# Altium PCB Visualizacion_PCB.PcbDoc
Units mm, origin at the board's own origin, x right, y up, seen from the top; angles counter-clockwise.
Board outline 38.02 x 30.53 mm, 2 copper layers (Top Layer, Bottom Layer); 14 components, 21 nets, 54 pads, 0 vias.
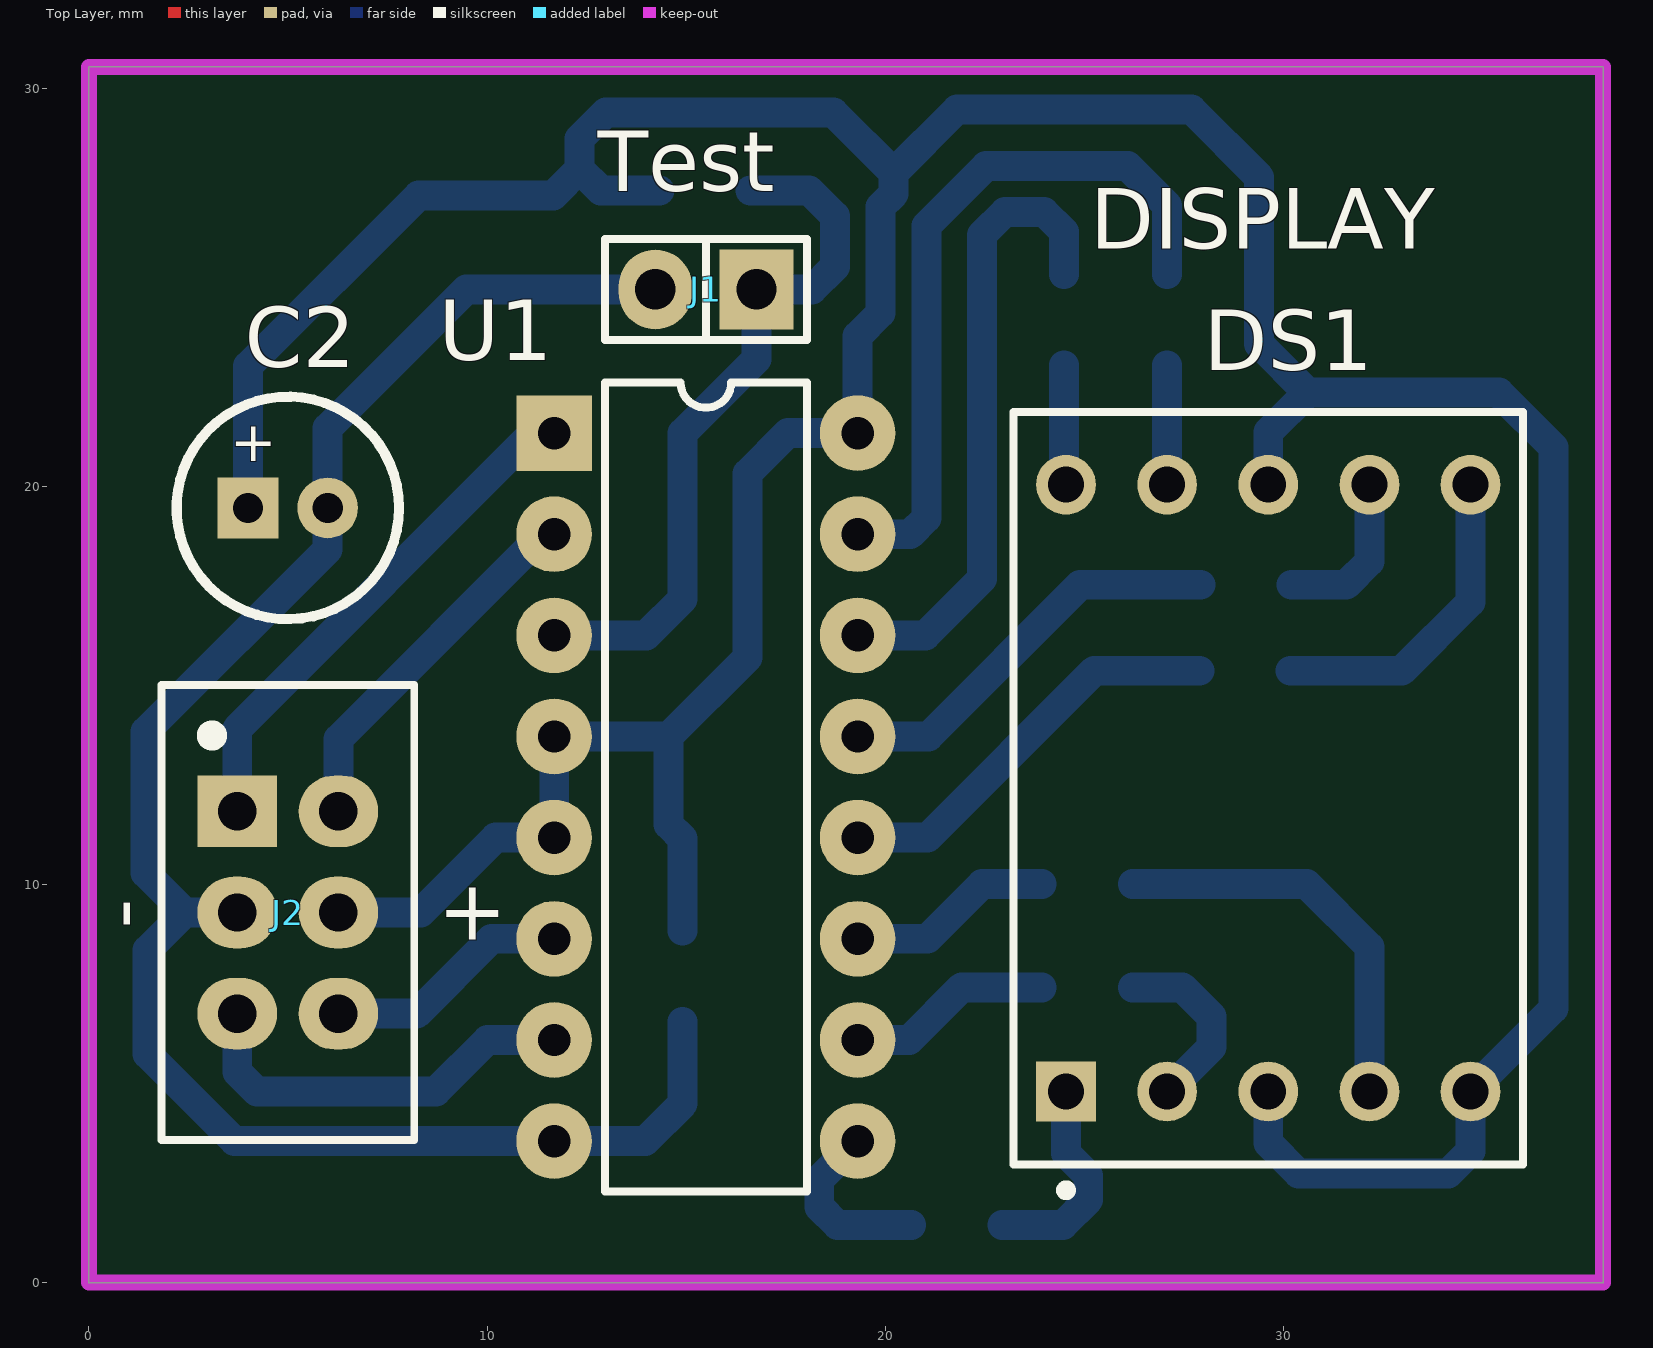
[diagram p0: Top Layer view]
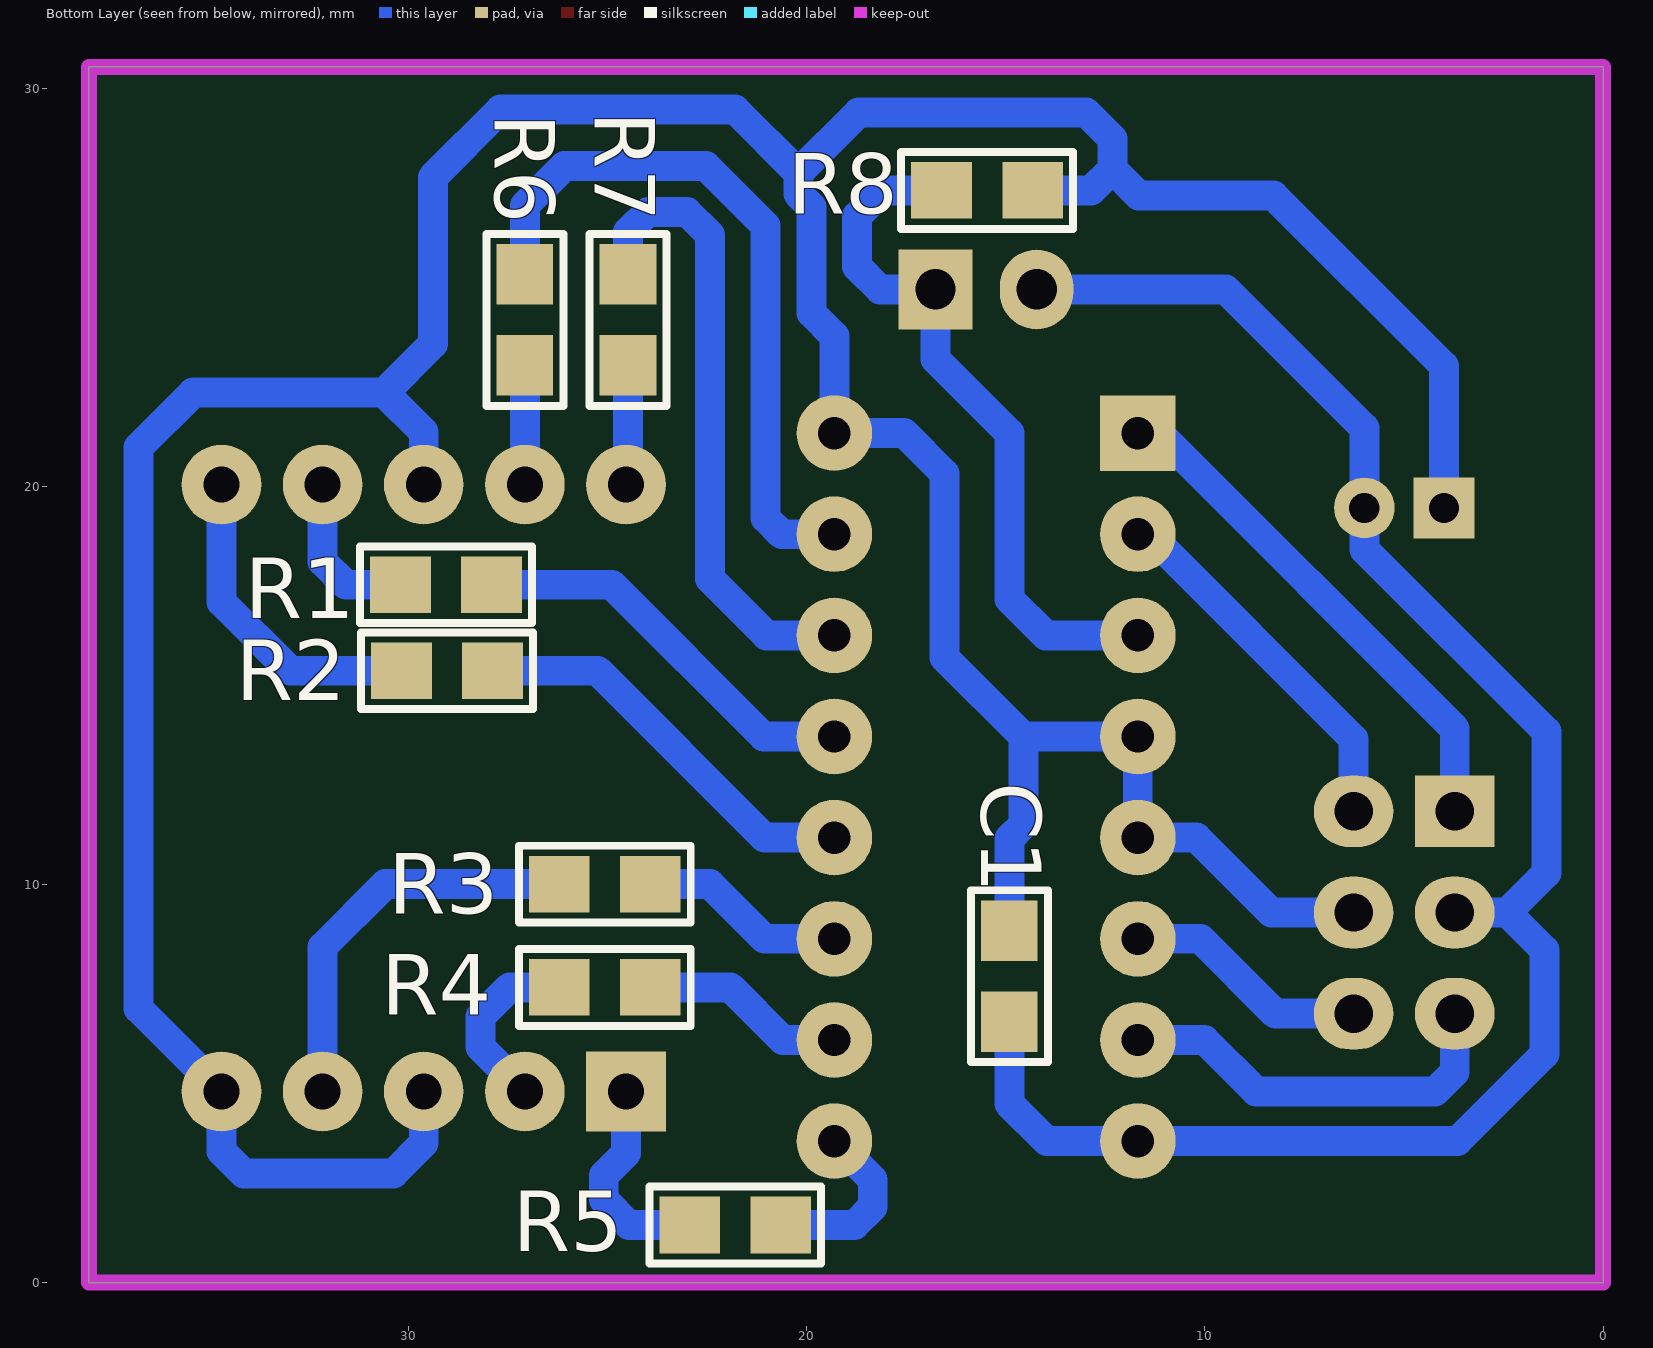
[diagram p1: Bottom Layer view, seen from below]
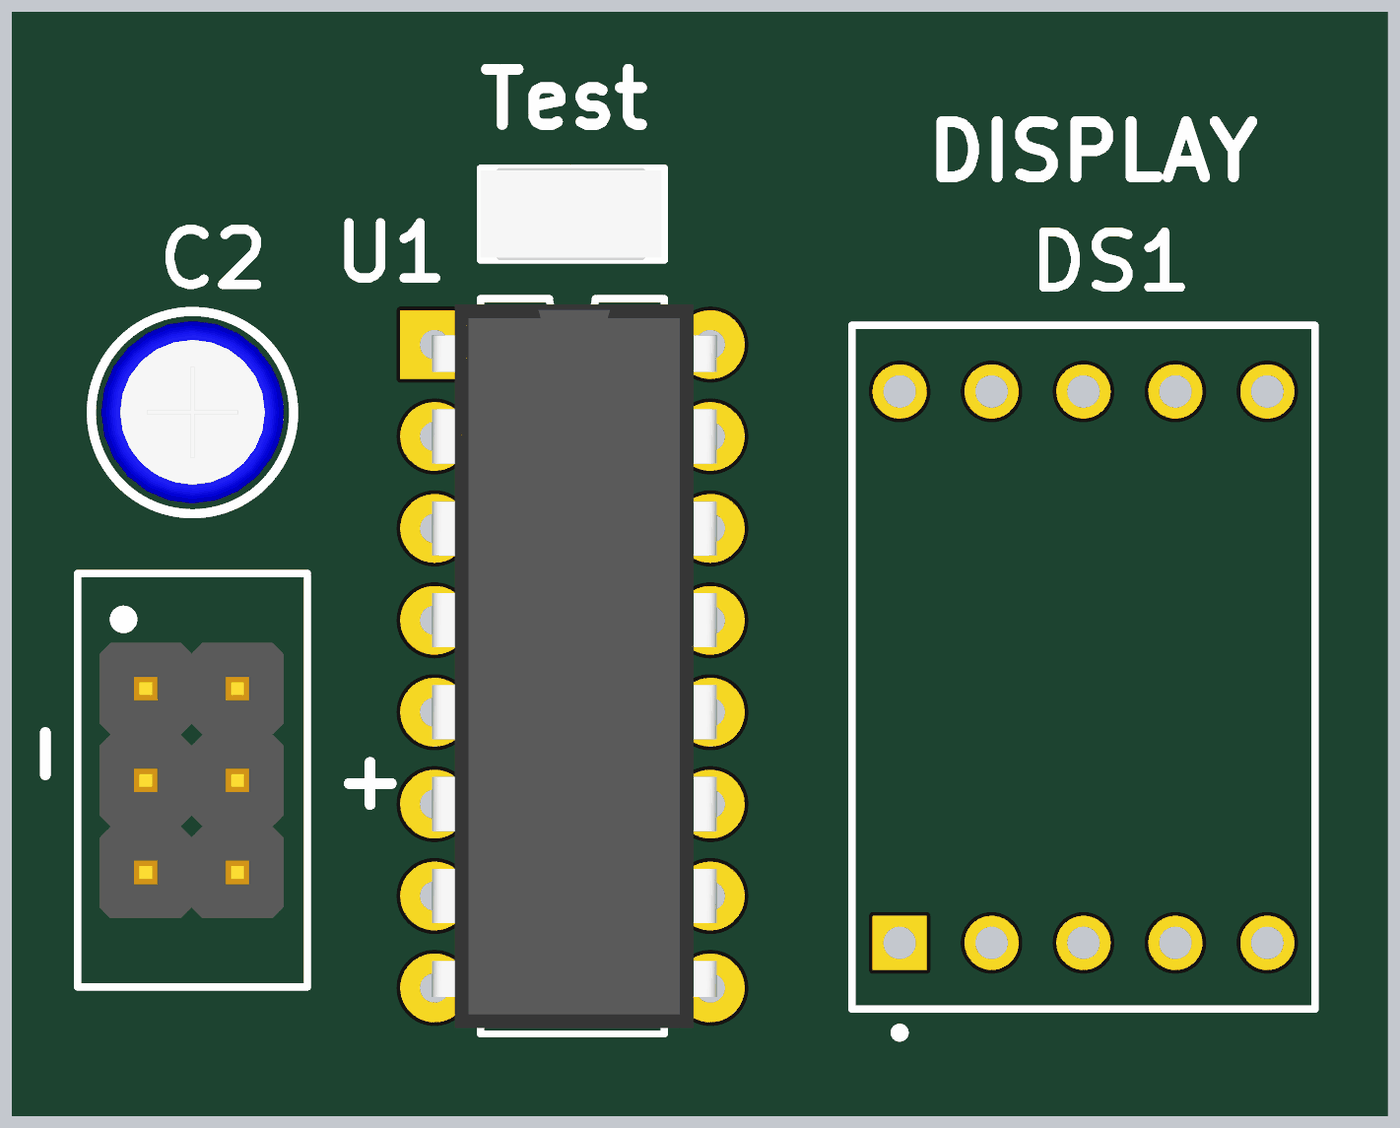
[diagram p2: 3D render of the assembled board from above, using the file's embedded part models]
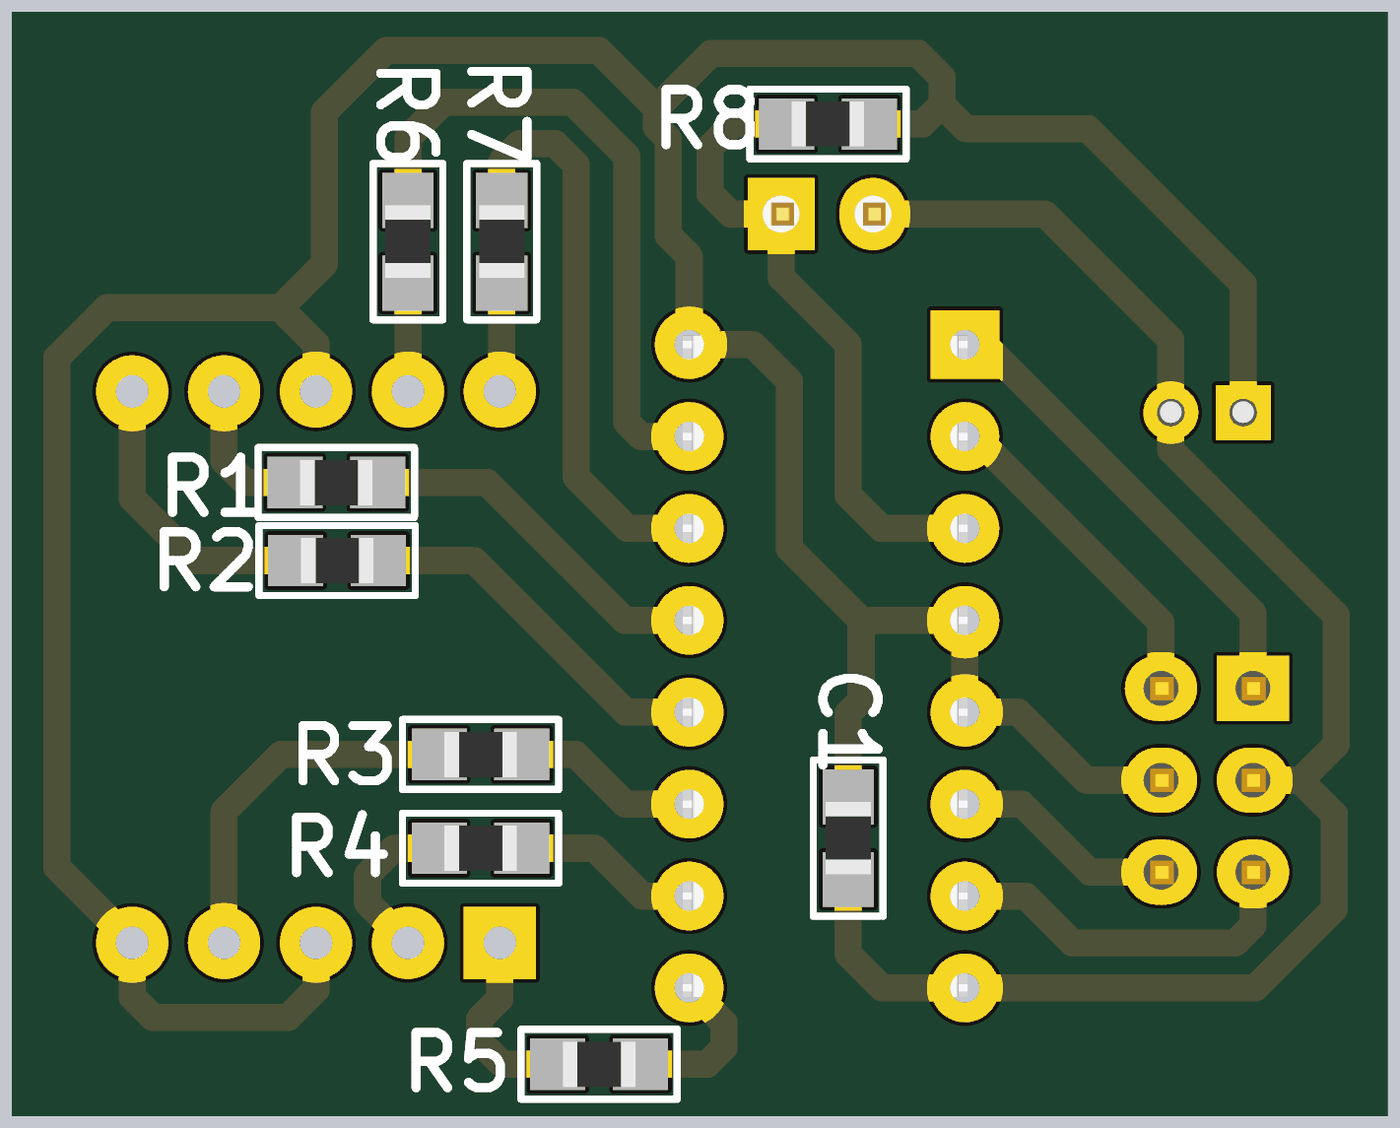
[diagram p3: 3D render of the assembled board from below, using the file's embedded part models]

## Layer stack, top to bottom
Top Solder: solder mask 0.0102, Solder Resist, Dk 3.5
Top Layer: signal copper 0.0356
Dielectric 1: dielectric 0.32, FR-4, Dk 4.8
Bottom Layer: signal copper 0.0356
Bottom Solder: solder mask 0.0102, Solder Resist, Dk 3.5

## Board outline
0,0 38.024,0 38.024,30.531 0,30.531

## Design rules (kind name [scope] priority, off if disabled: settings)
Clearance [All] p1: gap=0.4
PolygonConnect [All] p1: connectstyle=Relief reliefconductorwidth=0.254 reliefentries=4 polygonreliefangle="90 Angle" airgapwidth=0.254
RoutingVias [All] p1: holewidth=0.711 width=1.27 viastyle="Through Hole" minholewidth=0.711 minwidth=1.27 maxholewidth=0.711 maxwidth=1.27
SolderMaskExpansion [All] p1: expansion=0.102
Width [All] p1: maxlimit=0.75 minlimit=0.5 preferedwidth=0.6
Width PowerWidth [InNetClass('Power')] p2: maxlimit=2 minlimit=0.8 preferedwidth=1
30 further rules are at their usual default settings.

## Classes and differential pairs
net class Power: GND VCC

## Components (designator, comment, footprint, x,y, rotation, side; value= is the part's Value field where it differs from the comment)
C1 "100nF" 0805 14.91,7.696 r270 bottom
C2 "10uF" CAP100RP 4.994,19.456 r0 top
DS1 "Dpy Blue-CA" H 29.616,12.421 r0 top
J1 "JUMPER" JUMPER2 15.494,24.943 r180 top
J2 "INPUT" SIP3*2 3.724,11.836 r270 top
R1 "680" 0805 29.058,17.526 r0 bottom
R2 "680" 0805 29.032,15.367 r0 bottom
R3 "680" 0805 25.07,10.008 r0 bottom
R4 "680" 0805 25.07,7.417 r0 bottom
R5 "680" 0805 21.793,1.448 r0 bottom
R6 "680" 0805 27.076,24.181 r270 bottom
R7 "680" 0805 24.486,24.181 r270 bottom
R8 "100k" 0805 15.469,27.432 r180 bottom
U1 "SN74LS47N" DIP16 11.684,21.336 r0 top

## Footprints (in the part's own frame and the unit in brackets; to place one, negate y for a bottom-side part, rotate by r counter-clockwise, add the part's x,y. Pads: shape width x height; smd on the part's side, far side on the other; paste and mask are expansions set on the pad)
0805 [mil] "Pasivo 0805"
  rect 60x56 smd: 1(-45,0) 2(45,0)
  silkscreen extent -85,-38 85,38, body extent -39,-25 39,25, height 15
CAP100RP [mil] "Body diameter 5mm"
  rect 60x60 hole 30: 1(-39.37,0)
  round 60 hole 30: 2(39.37,0)
  silkscreen extent -110,-110 110,110, body extent -99,-99 99,100, height 454
DIP16 [mm]
  rect 1.9x1.9 hole 0.813: 1(0,0)
  round 1.9 hole 0.813: 2(0,-2.54) 3(0,-5.08) 4(0,-7.62) 5(0,-10.16) 6(0,-12.7) 7(0,-15.24) 8(0,-17.78) 9(7.62,-17.78) 10(7.62,-15.24) 11(7.62,-12.7) 12(7.62,-10.16) 13(7.62,-7.62) 14(7.62,-5.08) 15(7.62,-2.54) 16(7.62,0)
  silkscreen extent 1.27,-19.05 6.35,1.27, body extent -0.08,-18.89 7.79,1.11, height 1.98
H [mm] "LED, 7-Segment Display, 14.2 mm, RHD; 10 Leads; Row Space 15.24 mm; Pitch 2.54 mm"
  rect 1.5x1.5 / inner rect 1.5x1.5 / far side rect 2x2 hole 0.9: 1(-5.08,-7.62)
  round 1.5 / inner round 1.5 / far side round 2 hole 0.9: 2(-2.54,-7.62) 3(0,-7.62) 4(2.54,-7.62) 5(5.08,-7.62) 6(5.08,7.62) 7(2.54,7.62) 8(0,7.62) 9(-2.54,7.62) 10(-5.08,7.62)
  silkscreen extent -6.4,-10.22 6.4,9.45, body extent -6.4,-9.45 6.4,9.45, height 8.25
JUMPER2 [mm]
  rect 1.85x2 hole 1.016: 1(-1.27,0)
  oval 1.85x2 hole 1.016: 2(1.27,0)
  silkscreen extent -2.54,-1.27 2.54,1.27, body extent -2.46,-1.27 2.54,1.27, height 9.5
SIP3*2 [mm]
  rect 1.8x2 hole 0.965: 1(0,0)
  oval 1.8x2 hole 0.965: 2(0,2.54) 3(2.54,0) 4(2.54,2.54) 5(5.08,0) 6(5.08,2.54)
  silkscreen extent -3.18,-1.91 8.25,4.45, body extent -1.26,-1.3 6.36,3.78, height 10.1

## Part data
C1: library part CAP
C2: library part CAPPOL
DS1: "14.2 mm General Purpose Blue 7-Segment Display: CA, RH DP, Gray Surface"
J2: library part CON3*2
R1 R2 R3 R4 R5 R6 R7 R8: library part RES
U1: "BCD-to-Seven-Segment Decoder/Driver"

## Nets (pads, with @x,y where several pads share a name; then routed paths per layer and width w, separated by ;. In a path a pad name is that pad's centre, name@x,y a point inside that pad or via, vN(x,y) a via of type N, cw(c..) or ccw(c..) an arc to the next point about the centre after c; other vN are vias at no path point)
GND: C1.2 C2.2 J1.2 J2.3 U1.8 | length 46.2
  Bottom Layer w0.75: J2.3 2.413,9.296 ; J1.2 9.474,24.943 5.994,21.463 C2.2 5.994,18.415 1.422,13.843 1.422,10.287 2.413,9.296 ; C1.2 14.91,4.496 13.97,3.556 U1.8 3.658,3.556 1.473,5.74 1.473,8.357 2.413,9.296
NetDS1_1: DS1.1 R5.2 | length 5.4
  Bottom Layer w0.75: R5.2 24.46,1.448 25.095,2.083 25.095,2.692 24.536,3.251 DS1.1
NetDS1_2: DS1.2 R4.2 | length 4.6
  Bottom Layer w0.75: R4.2 27.457,7.417 28.194,6.68 28.194,5.918 DS1.2
NetDS1_4: DS1.4 R3.2 | length 10.3
  Bottom Layer w0.75: R3.2 30.582,10.008 32.156,8.433 DS1.4 DS1.4@32.106,4.851
NetDS1_6: DS1.6 R2.2 | length 8.2
  Bottom Layer w0.75: R2.2 32.969,15.367 34.696,17.094 DS1.6
NetDS1_7: DS1.7 R1.2 | length 4.1
  Bottom Layer w0.75: R1.2 31.572,17.526 32.156,18.11 DS1.7
NetDS1_9: DS1.9 R6.2 | length 3
  Bottom Layer w0.75: DS1.9 R6.2
NetDS1_10: DS1.10 R7.2 | length 3
  Bottom Layer w0.75: R7.2 24.486,20.091 DS1.10
NetJ1_1: J1.1 R8.1 U1.3 | length 18
  Bottom Layer w0.75: U1.3 13.995,16.256 14.91,17.17 14.91,21.336 16.764,23.19 J1.1 18.161,24.943 18.731,25.513 18.731,26.786 18.085,27.432 R8.1
NetR1_1: R1.1 U1.13 | length 10.2
  Bottom Layer w0.75: U1.13 21.082,13.716 24.892,17.526 R1.1
NetR2_1: R2.1 U1.12 | length 10.3
  Bottom Layer w0.75: U1.12 21.057,11.176 25.248,15.367 R2.1
NetR3_1: R3.1 U1.11 | length 5.2
  Bottom Layer w0.75: U1.11 21.057,8.636 22.428,10.008 R3.1
NetR4_1: R4.1 U1.10 | length 5.2
  Bottom Layer w0.75: U1.10 20.599,6.096 21.92,7.417 R4.1
NetR5_1: R5.1 U1.9 | length 4.6
  Bottom Layer w0.75: U1.9 18.339,2.591 18.339,1.905 18.796,1.448 R5.1
NetR6_1: R6.1 U1.15 | length 18
  Bottom Layer w0.75: U1.15 20.625,18.796 21.031,19.202 21.031,26.543 22.527,28.039 26.088,28.039 27.076,27.051 R6.1
NetR7_1: R7.1 U1.14 | length 15.9
  Bottom Layer w0.75: U1.14 21.006,16.256 22.428,17.678 22.428,26.314 23.004,26.889 23.987,26.889 24.486,26.391 R7.1
Q0: J2.5 U1.7 | length 10.2
  Bottom Layer w0.75: J2.5 3.724,5.293 4.216,4.801 8.712,4.801 10.008,6.096 U1.7
Q1: J2.1 U1.1 | length 13.1
  Bottom Layer w0.75: J2.1 3.724,13.91 11.151,21.336 U1.1
Q2: J2.2 U1.2 | length 9.4
  Bottom Layer w0.75: J2.2 6.264,13.656 11.405,18.796 U1.2
Q3: J2.6 U1.6 | length 6.2
  Bottom Layer w0.75: J2.6 8.23,6.756 10.109,8.636 U1.6
VCC: C1.1 C2.1 DS1.3 DS1.5 DS1.8 J2.4 R8.2 U1.4 U1.5 U1.16 | length 111.3
  Bottom Layer w0.75: C2.1 3.994,23.019 8.28,27.305 11.659,27.305 12.319,27.965 ; J2.4 8.331,9.296 10.211,11.176 U1.5 U1.4 14.554,13.716 ; R8.2 12.852,27.432 12.319,27.965 ; C1.1 14.91,11.151 14.554,11.506 14.554,13.716 ; DS1.3 29.616,3.505 30.378,2.743 34.138,2.743 34.696,3.302 DS1.5 36.779,6.883 36.779,20.98 35.408,22.352 30.607,22.352 ; DS1.8 29.616,21.361 30.607,22.352 ; 12.319,27.965 12.319,28.727 12.979,29.388 18.694,29.388 20.209,27.873 ; 14.554,13.716 16.535,15.697 16.535,20.32 17.551,21.336 U1.16 19.304,23.774 19.881,24.352 19.881,27.019 20.209,27.347 20.209,27.873 ; 20.209,27.873 21.8,29.464 27.686,29.464 29.388,27.762 29.388,23.571 30.607,22.352

## Keep-outs
Keep-Out Layer:
  the board outline again, w0.4

## Silkscreen, mask and mechanical layers (free items; w line width, h text height)
Top Overlay:
  text "Test" at 12.776,27.407 h1.52
  text "DISPLAY" at 25.146,25.959 h1.52
  text "-" at 1.524,8.89 h1.52 r90
  text "+" at 8.763,8.611 h1.52

## Text inside footprints (layer, text, board x,y; h text height)
C2: Top Overlay "+" at 3.547,20.625 h1.02